# EAGLE board dev_kit_f103 (EAGLE 9.6.2)
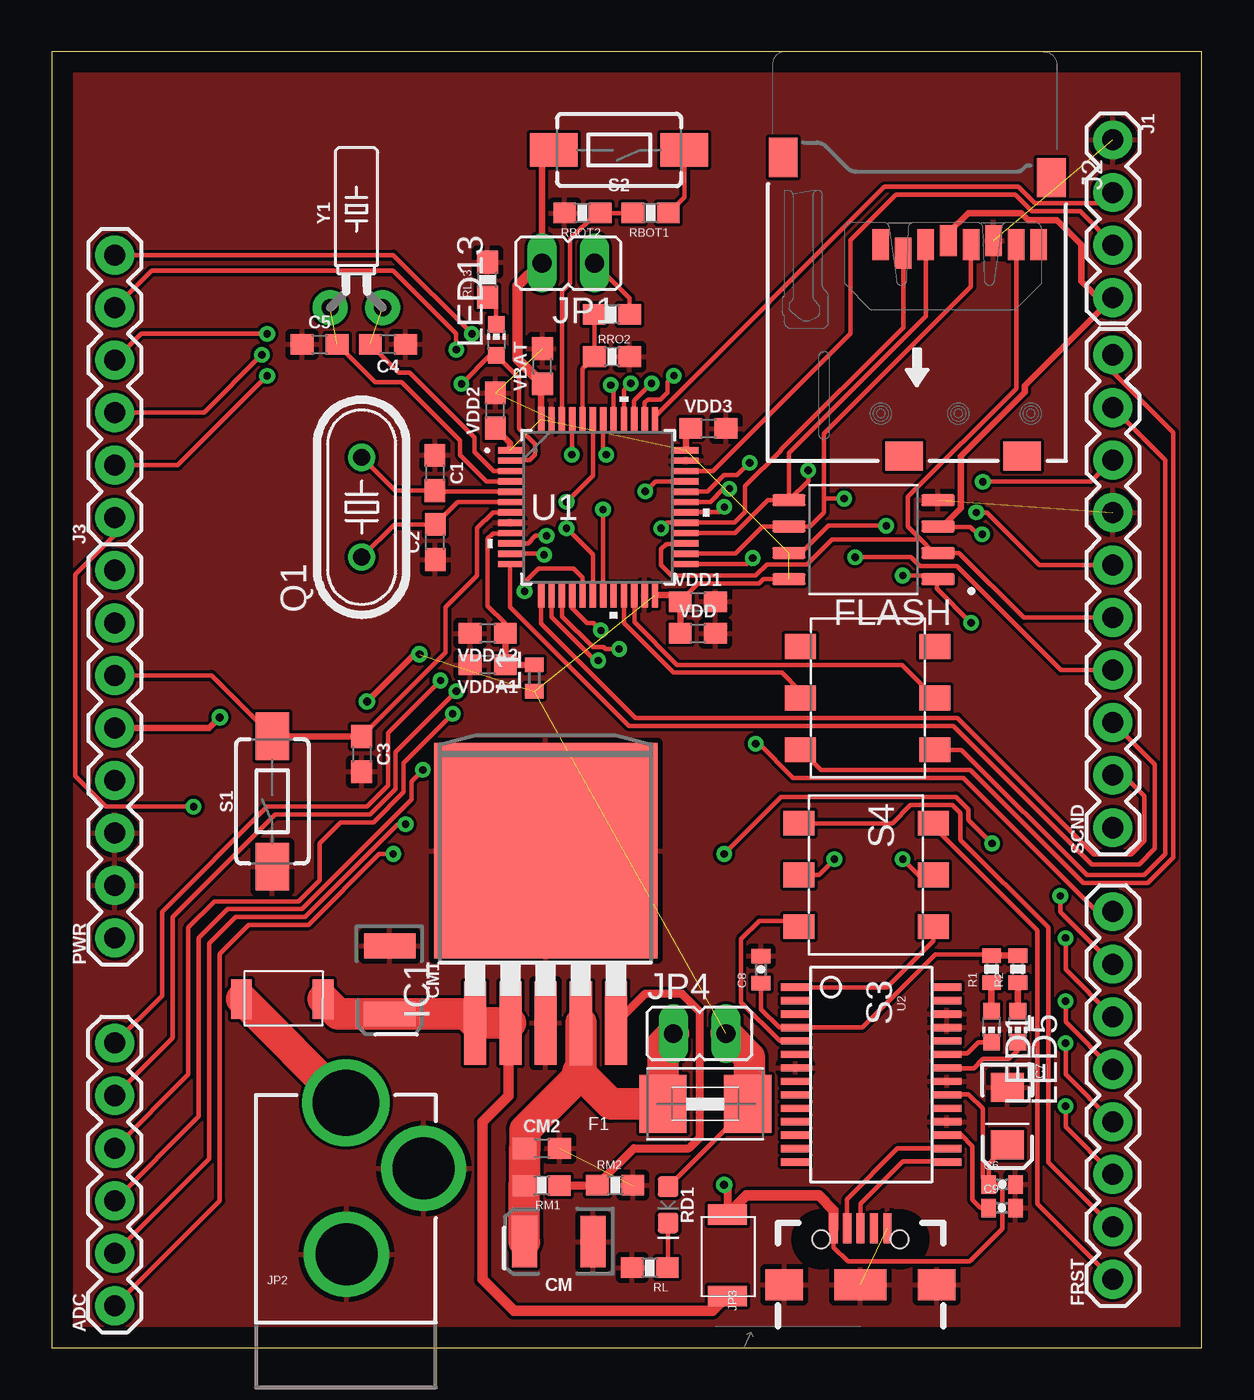
[diagram p0: board, top side]
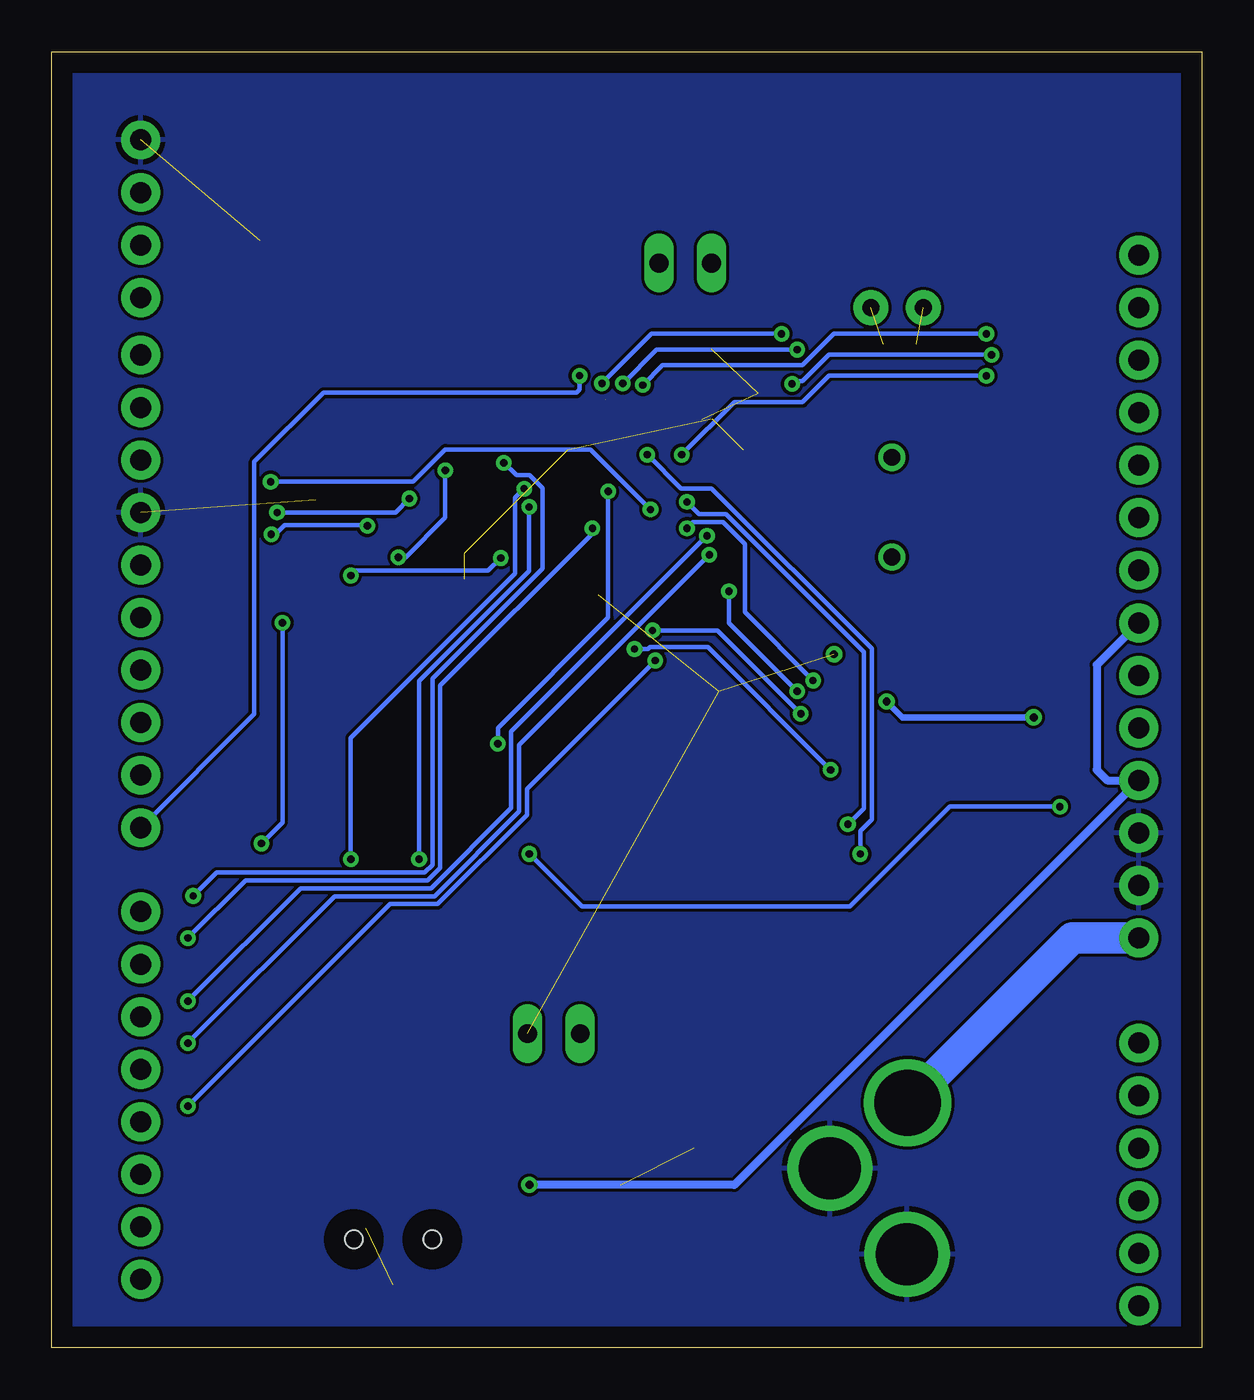
[diagram p1: board, bottom side, seen from below]

Size 55.61 x 62.66 mm. Coordinates in mm from the lower left corner, seen from the top.
Outline: 0,0 55.61,0 55.61,62.66 0,62.66 0,0
Copper layers (1*16): Top 0.035mm / dielectric 1.5mm / Bottom 0.035mm
Design rules "default": minimum track width 6mil, minimum drill 0.35mm, track to track 6mil, track to pad 6mil, pad to pad 6mil, via to via 6mil, smd to smd 6mil, copper to edge 40mil, drill to drill 6mil, minimum pad ring 10mil, minimum via ring 8mil, stop-mask expansion 4mil, vias tented up to drill 0mil, thermal gap 10mil
Net classes: 1 power: width 0.254 mm

## Footprints (pad centres in the part's own frame; a part is rotated, then mirrored left to right if it is on the bottom)
1X06 = drill 1.016 pad 1.88: 1 0,0; 2 2.54,0; 3 5.08,0; 4 7.62,0; 5 10.16,0; 6 12.7,0
0603 = smd 1.1 x 1: 1 -0.85,0; 2 0.85,0
0402-CAP = smd 0.7 x 0.9: 1 -0.65,0; 2 0.65,0
EIA3216 = smd 1.4 x 1.6: A 1.4,0; C -1.4,0
EIA3528 = smd 1.2 x 2.5: A 1.65,0; C -1.65,0
3ASCHOOTKY = smd 1 x 1.9: IN 0.446,-1.325; OUT 4.396,-1.325
1812 = smd 2.286 x 2.794: 1 -2.046,0; 2 2.046,0
W25Q64 = smd 1.61 x 0.58: CLK 3.605,-0.635; CS -3.605,1.905; DI 3.605,-1.905; DO -3.605,0.635; GND -3.605,-1.905; H/R 3.605,0.635; VCC 3.605,1.905; WP -3.605,-0.635
1X08 = drill 1.016 pad 1.88: 1 0,0; 2 2.54,0; 3 5.08,0; 4 7.62,0; 5 10.16,0; 6 12.7,0; 7 15.24,0; 8 17.78,0
TO263-5 = smd 1.067 x 4.039: 1 -3.404,-5.791; 2 -1.702,-5.791; 3 0,-5.791; 4 1.702,-5.791; 5 3.404,-5.791 | smd 10.8 x 10.41: 6 0,2.54
1X04 = drill 1.016 pad 1.88: 1 0,0; 2 2.54,0; 3 5.08,0; 4 7.62,0
CON-SD-CARD_2908-05 = smd 0.8 x 1.5: 1 1.761,3.847; 2 0.669,4.253; 3 -0.423,3.847; 4 -1.515,3.644; 5 -2.607,3.847; 6 -3.7,3.644; 7 -4.792,3.847; 8 -5.884,3.847 | smd 1.397 x 1.905: GND@1 -6.5,0.6; GND@2 6.473,-0.389 | smd 1.803 x 1.397: GND@3 0.631,14.059; GND@4 -5.084,14.059
JP1 = drill 0.914 long: 1 0,-1.27; 2 0,1.27
POWER_JACK_PTH_LOCK = drill 2.997 pad 4.115: GND 0.025,6.557; GNDBREAK 3.762,10.7 | drill 3.2 pad 4.115: PWR 0,13.878
USB-B-MICRO-SMD_V03 = smd 1.45 x 0.4: D+1 2.725,0; D-1 2.725,0.65; GND1 2.725,-1.3; ID1 2.725,-0.65; VBUS1 2.725,1.3 | smd 1.5 x 1.8: SHIELD1 0,3.685; SHIELD2 0,-3.685 | smd 1.5 x 2.5: SHIELD3 0,0 | hole 0.85: 2.2,1.9; 2.2,-1.9
0402 = smd 0.7 x 0.9: 1 -0.65,0; 2 0.65,0
CHIP-LED0603 = smd 0.8 x 0.8: A 0,-0.75; C 0,0.75
HC49/S = drill 0.813: 1 -2.413,0; 2 2.413,0
0402-RES = smd 0.7 x 0.9: 1 -0.65,0; 2 0.65,0
0603-RES = smd 1.1 x 1: 1 -0.85,0; 2 0.85,0
LED-0603 = smd 1 x 1: A -0.877,0; C 0.877,0
TACTILE_SWITCH_SMD_6.0X3.5MM = smd 2.3 x 1.6: 1 -3.15,0; 2 3.15,0
452403012014 = smd 1.2 x 1.5: 1 -2.5,3.25; 2 0,3.25; 3 2.5,3.25; 4 -2.5,-3.25; 5 0,-3.25; 6 2.5,-3.25
1X10 = drill 1.016 pad 1.88: 1 0,0; 2 2.54,0; 3 5.08,0; 4 7.62,0; 5 10.16,0; 6 12.7,0; 7 15.24,0; 8 17.78,0; 9 20.32,0; 10 22.86,0
LQFP48-7X7MM = smd 1.194 x 0.305: 1 -4.25,2.75; 2 -4.25,2.25; 3 -4.25,1.75; 4 -4.25,1.25; 5 -4.25,0.75; 6 -4.25,0.25; 7 -4.25,-0.25; 8 -4.25,-0.75; 9 -4.25,-1.25; 10 -4.25,-1.75; 11 -4.25,-2.25; 12 -4.25,-2.75; 25 4.25,-2.75; 26 4.25,-2.25; 27 4.25,-1.75; 28 4.25,-1.25; 29 4.25,-0.75; 30 4.25,-0.25; 31 4.25,0.25; 32 4.25,0.75; 33 4.25,1.25; 34 4.25,1.75; 35 4.25,2.25; 36 4.25,2.75 | smd 0.305 x 1.194: 13 -2.75,-4.25; 14 -2.25,-4.25; 15 -1.75,-4.25; 16 -1.25,-4.25; 17 -0.75,-4.25; 18 -0.25,-4.25; 19 0.25,-4.25; 20 0.75,-4.25; 21 1.25,-4.25; 22 1.75,-4.25; 23 2.25,-4.25; 24 2.75,-4.25; 37 2.75,4.25; 38 2.25,4.25; 39 1.75,4.25; 40 1.25,4.25; 41 0.75,4.25; 42 0.25,4.25; 43 -0.25,4.25; 44 -0.75,4.25; 45 -1.25,4.25; 46 -1.75,4.25; 47 -2.25,4.25; 48 -2.75,4.25
SSOP28DB = smd 0.348 x 1.397: 1 -4.225,-3.656; 2 -3.575,-3.656; 3 -2.925,-3.656; 4 -2.275,-3.656; 5 -1.625,-3.656; 6 -0.975,-3.656; 7 -0.325,-3.656; 8 0.325,-3.656; 9 0.975,-3.656; 10 1.625,-3.656; 11 2.275,-3.656; 12 2.925,-3.656; 13 3.575,-3.656; 14 4.225,-3.656; 15 4.225,3.656; 16 3.575,3.656; 17 2.925,3.656; 18 2.275,3.656; 19 1.625,3.656; 20 0.975,3.656; 21 0.325,3.656; 22 -0.325,3.656; 23 -0.975,3.656; 24 -1.625,3.656; 25 -2.275,3.656; 26 -2.925,3.656; 27 -3.575,3.656; 28 -4.225,3.656
CRYSTAL-PTH-2X6-CYL-KIT = drill 0.813 pad 1.676: 1 -1.27,0; 2 1.27,0

## Placement (x,y rotation side)
ADC  [1X06]  3.05,2.03 90 top
C1  22pF  [0603]  18.52,42.3 270 top
C2  22pF  [0603]  18.54,38.96 90 top
C3  0.1uF  [0603]  14.99,28.7 270 top
C4  15pF  [0603]  16.26,48.51 180 top
C5  15pF  [0603]  12.95,48.51 0 top
C6  0.1uF  [0402-CAP]  45.95,7.9 0 top
C7  10uF  [EIA3216]  46.21,11.2 270 top
C8  0.1uF  [0402-CAP]  34.29,18.29 90 top
C9  0.1uF  [0402-CAP]  45.95,6.76 0 top
CM  10uF  [EIA3528]  24.52,5.13 180 top
CM1  10uF  [EIA3528]  16.35,17.79 270 top
CM2  100nF  [0603]  23.71,9.65 0 top
D1  [3ASCHOOTKY]  34,6.89 270 top
D2  [3ASCHOOTKY]  8.73,18.18 0 top
F1  [1812]  31.6,11.79 0 top
FLASH  [W25Q64]  39.25,39.07 180 top
FRST  [1X08]  51.31,3.31 90 top
IC1  [TO263-5]  23.88,21.49 0 top
J1  [1X04]  51.31,58.4 270 top
J2  CON-SD-CARD_MICROSD-2908-05  [CON-SD-CARD_2908-05]  41.84,57.17 180 top
J3  [1X06]  3.05,40.13 90 top
JP1  [JP1]  24.97,52.45 90 top
JP2  POWER  [POWER_JACK_PTH_LOCK]  14.22,-2.03 0 top
JP3  USB  [USB-B-MICRO-SMD_V03]  39.1,3.05 90 top
JP4  [JP1]  31.32,15.19 270 top
L1  BLM15HB221SN1  [0402]  23.34,32.38 90 top
LED1  GREEN  [CHIP-LED0603]  45.44,15.52 180 top
LED5  YELLOW  [CHIP-LED0603]  46.71,15.52 180 top
LED13  [CHIP-LED0603]  21.49,48.73 0 top
PWR  [1X08]  3.05,19.81 90 top
Q1  [HC49/S]  14.99,40.64 90 top
R1  470  [0402-RES]  45.44,18.31 90 top
R2  470  [0402-RES]  46.71,18.31 90 top
RBOT1  330  [0603-RES]  28.96,54.86 180 top
RBOT2  10k  [0603-RES]  25.65,54.86 180 top
RD1  Red  [LED-0603]  29.8,6.91 270 top
RL  1.5k  [0603-RES]  28.92,3.87 180 top
RL13  470  [0603-RES]  21.07,51.64 90 top
RM1  316  [0603-RES]  23.7,7.85 180 top
RM2  187  [0603-RES]  27.24,7.87 0 top
RRO1  10k  [0603-RES]  27.09,47.92 0 top
RRO2  330  [0603-RES]  27.09,49.96 180 top
S1  MOMENTARY-SWITCH-SPST-SMD-6.0X3.5MM  [TACTILE_SWITCH_SMD_6.0X3.5MM]  10.67,26.42 90 top
S2  MOMENTARY-SWITCH-SPST-SMD-6.0X3.5MM  [TACTILE_SWITCH_SMD_6.0X3.5MM]  27.43,57.91 180 top
S3  [452403012014]  39.37,22.86 270 top
S4  [452403012014]  39.46,31.41 270 top
SCND  [1X10]  51.31,25.14 90 top
U1  [LQFP48-7X7MM]  26.42,40.64 0 top
U2  FT232RLSSOP  [SSOP28DB]  39.62,13.21 270 top
VBAT  100nF  [0603]  23.73,47.45 90 top
VDD  4.7uF  [0603]  31.24,34.54 0 top
VDD1  100nF  [0603]  31.24,36.07 0 top
VDD2  100nF  [0603]  21.45,45.31 90 top
VDD3  100nF  [0603]  31.75,44.45 0 top
VDDA1  1uF  [0603]  21.08,33.02 180 top
VDDA2  100nF  [0603]  21.08,34.54 180 top
Y1  32.768kHz  [CRYSTAL-PTH-2X6-CYL-KIT]  14.73,50.29 0 top

## Library data of the parts
ADC J3 = SparkFun-Connectors; PROD_ID: CONN-08437
C1-C5 = SparkFun-Capacitors; PROD_ID: CAP-07876
C6-C9 R1 R2 U2 = SparkFun
CM CM1 = SparkFun-Capacitors; PROD_ID: CAP-08063
CM2 VBAT VDD VDD1-VDD3 VDDA1 VDDA2 = SparkFun-Capacitors; PROD_ID: CAP-00810
D1 D2 = 1N4007
F1 LED1 LED5 LED13 = adafruit
FLASH = W25Q64
FRST PWR = SparkFun-Connectors; PROD_ID: CONN-08438
IC1 = MIC29302WU; AVAILABILITY: Good; DESCRIPTION: Linear Voltage Regulator IC Positive Adjustable 1 Output 3A TO-263-5; MF: Microchip Technology; MP: MIC29302WU; PACKAGE: TO-263-6 Microchip Technology; PRICE: None; PURCHASE-URL: https://pricing.snapeda.com/search/part/MIC29302WU/?ref=eda
J1 = SparkFun-Connectors; PROD_ID: CONN-09696
J2 = 52101-101-REV-A_v16
JP1 JP4 = jumper
JP2 = SparkFun-Connectors; PROD_ID: CONN-08197; SF_ID: PRT-00119
JP3 = SparkFun-Connectors; PROD_ID: CONN-11752
L1 = inductors
Q1 = crystal; OC_FARNELL: 1667008; OC_NEWARK: unknown
RBOT1 RBOT2 RL RL13 RM1 RM2 RRO1 RRO2 = SparkFun-Resistors; PROD_ID: RES-08296
RD1 = SparkFun-LED; PROD_ID: DIO-11154
S1 S2 = SparkFun-Switches; PROD_ID: SWCH-00815; SF_SKU: COM-08229
S3 S4 = step_switch
SCND = SparkFun-Connectors; PROD_ID: CONN-11563
U1 = STM32F103C8T6; BUILT_BY: EMA_UL_Team; COPYRIGHT: Copyright (C) 2018 Accelerated Designs. All rights reserved; MANUFACTURER_PART_NUMBER: STM32F103C8T6; SOURCELIBRARY: Updates_to_database_2020-10-19; VENDOR: STMicroelectronics
Y1 = SparkFun-Clocks; PROD_ID: XTAL-10112

## Nets
3.3V: F1.2 FLASH.H/R FLASH.VCC FLASH.WP J1.4 J2.4 JP1.2 JP4.2 L1.1 PWR.5 RD1.A S2.2 U1.1 U1.24 U1.36 U1.48 VBAT.1 VDD1.1 VDD2.1 VDD3.1 VDD.1
BOOT0: RRO1.1 RRO2.2 U1.44
BUTTON: RBOT1.2 RBOT2.1 U1.46
CRX1: FRST.1 S3.1
CRX3: S4.1
CS2: FLASH.CS J3.1 U1.25
CSCL: S4.6 SCND.10
CSDA: S4.3 SCND.9
CTX1: FRST.2 S3.4
CTX3: S4.4
GND: C1.1 C2.1 C3.2 C4.1 C5.1 C6.2 C7.C C8.2 C9.2 CM1.C CM2.2 CM.C FLASH.GND IC1.3 IC1.6 J1.1 J2.6 JP2.GND JP2.GNDBREAK JP3.GND1 JP3.SHIELD1 JP3.SHIELD2 JP3.SHIELD3 PWR.2 PWR.3 RBOT2.2 RL13.2 RL.2 RM2.2 RRO1.2 S1.1 SCND.7 U1.8 U1.23 U1.35 U1.47 U2.7 U2.18 U2.21 U2.25 U2.26 VBAT.2 VDD1.2 VDD2.2 VDD3.2 VDD.2 VDDA1.2 VDDA2.2
LED: J3.3 LED13.A U1.2
MISO2: FLASH.DO J2.7 SCND.5 U1.27
MOSI2: FLASH.DI J2.3 SCND.4 U1.28
N$1: CM1.A D1.OUT D2.OUT IC1.1 IC1.2
N$2: CM2.1 CM.A F1.1 IC1.4 JP4.1 RM1.2
N$3: JP1.1 RRO2.1
N$4: LED13.C RL13.1
N$5: RBOT1.1 S2.1
N$6: LED1.A R1.1
N$7: LED5.A R2.1
N$8: C9.1 U2.17
N$20: IC1.5 RM1.1 RM2.1
N$35: RD1.C RL.1
NRST: C3.1 PWR.6 S1.2 U1.7
OSC32_IN: C4.2 U1.3 Y1.2
OSC32_OUT: C5.2 U1.4 Y1.1
OSC_IN: C1.2 Q1.2 U1.5
OSC_OUT: C2.2 Q1.1 U1.6
PA0: FRST.5 U1.10
PA1: FRST.4 U1.11
PA4: FRST.3 U1.14
PA5: ADC.3 U1.15
PA6: ADC.4 U1.16
PA7: ADC.5 U1.17
PA8: FRST.6 J2.2 U1.29
PA11: FRST.7 U1.32
PA12: FRST.8 U1.33
PA15: SCND.1 U1.38
PB0: ADC.6 U1.18
PB1: SCND.8 U1.19
PB3: J3.6 U1.39
PB4: J3.5 U1.40
PB5: J3.4 U1.41
PB8: J3.2 U1.45
RX1: S3.2 U1.31
RX2: SCND.2 U1.13
RX3/SDA2: S4.2 U1.22
RXLED: LED5.C U2.22
SCK2: FLASH.CLK J2.5 SCND.6 U1.26
SCL1: ADC.1 U1.42
SDA1: ADC.2 U1.43
SWCLK: J1.2 U1.37
SWDIO: J1.3 U1.34
TX1: S3.5 U1.30
TX2: SCND.3 U1.12
TX3/SCL2: S4.5 U1.21
TXLED: LED1.C U2.23
URX1: S3.3 U2.1
USB_D+: JP3.D+1 U2.15
USB_D-: JP3.D-1 U2.16
UTX1: S3.6 U2.5
V_USB: C6.1 C7.A D1.IN JP3.VBUS1 PWR.4 PWR.7 U2.20
VCC: C8.1 R1.2 R2.2 U2.4
VDDA: L1.2 U1.9 VDDA1.1 VDDA2.1
VIN: D2.IN JP2.PWR PWR.1

## Tracks (layer width: path | path; a pad name or v marks a point on that pad's centre or on a via)
3.3V  (via drill 0.35, 0.38)  (7 unrouted)
  Top 0.229: F1.2 33.81,11.79 33.74,11.73 RD1.A | VDD1.1 30.39,36.11 31.24,36.96 34.19,36.96 34.4,37.16 FLASH.VCC | FLASH.H/R 36.23,38.44 37.55,39.76 40.33,39.76 v40.35,39.74 | v44.99,39.33 44.78,39.33 44.42,39.69 43.18,39.69 42.87,39.69 FLASH.WP
  Top 0.305: F1.2 33.55,11.69 | VDD2.1 22.17,43.75 U1.1 | U1.48 23.67,46.54 VBAT.1 | U1.36 30.67,44.22 VDD3.1 | U1.24 30.07,36.39 VDD1.1 VDD.1 | J2.4 43.35,53.91 44.31,54.86 46.89,54.86 47.22,54.53 48.59,54.53 49.78,53.34 49.78,51.56 50.57,50.78 J1.4 47.05,46.52 47.05,46.2 43.96,43.11 43.96,40.6 43.18,39.82 43.18,39.69 | JP1.2 23.7,57.33 S2.2 | PWR.5 7.62,29.97 v8.13,30.48 | v15.24,31.24 17.53,33.53 v17.78,33.53
  Top 0.508: VBAT.1 22.53,47.81 22.53,51.34 23.63,52.45 JP1.2
  Top 1.524: JP4.2 33.74,14.04 33.74,11.73
  Bottom 0.229: v40.35,39.74 40.4,39.79 44.33,39.79 44.79,39.33 v44.99,39.33
  Bottom 0.305: v8.13,30.48 14.48,30.48 v15.24,31.24
BOOT0
  Top 0.229: RRO2.2 RRO1.1 25.67,47.35 U1.44
BUTTON
  Top 0.229: RBOT1.2 RBOT2.1 26.33,54.86 25.06,53.59 25.06,51.47 24.67,51.07 U1.46
CRX1
  Top 0.229: FRST.1 47.65,6.96 47.65,20.18 42.62,25.21 S3.1
CS2  (via drill 0.35)
  Top 0.229: U1.25 33.6,37.89 v33.89,38.18 | v41.15,37.34 42.68,37.34 42.8,37.21 | 42.8,37.21 FLASH.CS | J3.1 3.05,39.29 1.13,37.38 1.13,27.64 2.61,26.16 v6.86,26.16 | v45.47,24.38 44.32,25.53 44.32,26.02 43.71,26.63 35.27,26.63 v32.51,23.88 | v44.45,35.05 42.8,36.7 42.8,37.21
  Bottom 0.229: v33.89,38.18 34.5,37.57 40.92,37.57 v41.15,37.34 | v6.86,26.16 12.19,26.16 17.02,21.34 29.97,21.34 v32.51,23.88 | v45.47,24.38 44.45,25.4 v44.45,35.05
CSCL
  Top 0.229: SCND.10 51.3,47.17 54.23,44.25 54.23,23.72 52.99,22.48 49.88,22.48 44.42,27.94 37.18,27.94 S4.6
CSDA
  Top 0.229: SCND.9 53.85,42.92 53.85,23.88 52.83,22.86 50.04,22.86 43.99,28.91 S4.3
CTX1
  Top 0.229: FRST.2 48.18,8.97 48.18,20.32 43.94,24.56 43.94,25.86 43.55,26.25 41.53,26.25 40.64,25.36 S3.4
GND  (6 unrouted)
  pour Top: -5.59,65.02 -5.59,-3.81 59.18,-3.81 59.18,65.02
  pour Bottom: -7.87,67.06 -7.87,-6.1 62.23,-6.1 62.23,67.06
LED  (via drill 0.35)
  Top 0.229: U1.2 22.2,42.93 23.11,42.93 23.37,43.18 23.37,43.69 22.61,44.45 22.61,46.87 LED13.A 21.2,47.98 v19.81,46.6 | J3.3 7.37,45.22 v10.16,48.01
  Bottom 0.229: v10.16,48.01 18.03,48.01 19.3,46.74 19.68,46.74 v19.81,46.6
MISO2
  Top 0.229: J2.7 46.63,46.38 41.4,41.15 41.4,39.69 41.94,39.15 | FLASH.DO 42.66,38.44 41.94,39.15 | U1.27 30.64,38.86 29.72,38.86 29.46,38.61 29.46,37.85 29.97,37.34 34.04,37.34 34.58,37.88 36.51,37.88 37.72,39.09 41.88,39.09 41.94,39.15 | 42.19,38.44 FLASH.DO | SCND.5 46.99,35.3 43.86,38.44 FLASH.DO
MOSI2  (via drill 0.35)
  Top 0.229: J2.3 42.26,49.88 35.64,43.26 FLASH.DI | U1.28 33.04,39.39 34.62,40.98 FLASH.DI | SCND.4 48.78,32.77 43.76,37.79 41.97,37.79 41.54,38.22 v38.84,38.22 | v36.58,42.42 36.58,41.91 FLASH.DI
  Bottom 0.229: v38.84,38.22 38.83,38.21 38.5,38.21 36.58,40.13 v36.58,42.42
N$1
  Top 0.508: D1.OUT 31.96,1.78 22.35,1.78 20.83,3.3 20.83,10.92 22.1,12.19 22.1,15.62 IC1.2
  Top 1.524: D2.OUT 13.85,16.13 CM1.A 20.04,16.13 IC1.1 IC1.2
N$2
  Top 1.524: CM.A 22.85,5.15 RM1.2 CM2.1 22.88,9.67 22.88,10.54 24.07,11.73 | JP4.1 29.55,14.69 F1.1 27.03,11.79 25.58,13.24 | 24.07,11.73 | IC1.4 25.58,13.5 25.45,13.37 25.58,13.24 | 24.07,11.73 25.58,13.24
N$3
  Top 0.229: JP1.1 27.94,50.75 RRO2.1
N$4
  Top 0.229: RL13.1 21.49,50.37 LED13.C
N$5
  Top 0.229: 30.31,58.18 S2.1 30.58,55.64 RBOT1.1
N$6
  Top 0.305: R1.1 LED1.A
N$7
  Top 0.305: R2.1 LED5.A
N$8
  Top 0.229: U2.17 43.29,10.3 43.97,10.3 44.52,9.75 44.52,7.15 44.9,6.76 C9.1
N$20
  Top 0.381: RM1.1 24.56,7.87 RM2.1 26.63,8.1 26.63,8.14 28.14,9.65 30.82,9.65 31.33,10.16 31.33,16.27 30.48,17.12 28.7,17.12 IC1.5
N$35
  Top 0.229: RD1.C 29.8,3.91 RL.1
NRST
  Top 0.229: U1.7 21.34,40.39 20.57,39.62 20.57,37.34 19.05,35.81 19.05,33.62 C3.1 | PWR.6 7.73,32.51 10.68,29.55
  Top 0.305: C3.1 10.68,29.55 S1.2
OSC32_IN  (1 unrouted)
  Top 0.229: U1.3 21.36,42.39 20.45,43.31 20.45,44.01 17.31,47.15 16.77,47.15 C4.2
OSC32_OUT  (1 unrouted)
  Top 0.229: C5.2 15.63,46.69 16.93,46.69 19.75,43.86 19.75,43.17 21.03,41.89 U1.4
OSC_IN
  Top 0.229: Q1.2 16.59,41.45 C1.2 18.58,41.39 U1.5
OSC_OUT
  Top 0.229: Q1.1 16.57,39.81 C2.2 19.62,40.89 U1.6
PA0  (via drill 0.35)
  Top 0.229: FRST.5 49.02,15.75 v49.02,16.76 | U1.10 23.03,38.89 23.4,39.26 v23.92,39.26
  Bottom 0.229: v49.02,16.76 43.57,22.21 37.26,22.21 33.39,26.09 33.39,29.79 v23.92,39.26
PA1  (via drill 0.35)
  Top 0.229: FRST.4 49.02,13.21 v49.02,14.73 | v23.81,38.34 23.76,38.39 U1.11
  Bottom 0.229: v49.02,14.73 41.92,21.83 37.11,21.83 33.01,25.93 33.01,29.14 v23.81,38.34
PA4  (via drill 0.35)
  Top 0.229: FRST.3 49.02,10.67 v49.02,11.68 | v26.42,33.23 26.27,33.23 24.17,35.33 U1.14
  Bottom 0.229: v49.02,11.68 39.25,21.45 36.95,21.45 32.63,25.77 32.63,27.02 v26.42,33.23
PA5  (via drill 0.35)
  Top 0.229: ADC.3 7.11,11.18 7.11,19.81 8.51,21.21 12.1,21.21 17.4,26.51 17.4,27.39 v17.95,27.94 | v27.43,33.78 26.78,33.78 26.69,33.87 26.16,33.87 24.67,35.37 U1.15
  Bottom 0.229: v27.43,33.78 26.78,33.78 26.69,33.87 23.88,33.87 v17.95,27.94
PA6  (via drill 0.35)
  Top 0.229: ADC.4 6.6,13.21 6.6,20.32 7.87,21.59 11.94,21.59 12.95,22.61 12.95,24.38 13.97,25.4 15.56,25.4 17.02,26.86 17.02,28.28 v19.39,30.65 | v26.55,34.68 26.18,35.05 25.88,35.05 25.17,35.76 U1.16
  Bottom 0.229: v19.39,30.65 23.42,34.68 v26.55,34.68
PA7  (via drill 0.35)
  Top 0.229: ADC.5 5.84,14.99 5.84,20.83 10.8,25.78 15.4,25.78 16.64,27.02 16.64,28.81 v19.57,31.74 | v22.86,36.58 22.83,36.6 22.83,36.96 23.55,37.68 25.24,37.68 25.67,37.25 U1.17
  Bottom 0.229: v19.57,31.74 22.86,35.04 v22.86,36.58
PA8  (via drill 0.35)
  Top 0.229: J2.2 41.17,49.33 35.26,43.42 35.26,43.39 33.53,41.66 33.53,40.42 33,39.89 U1.29 29.73,39.89 v29.46,39.62 | FRST.6 49.02,18.29 v49.02,19.81
  Bottom 0.229: v29.46,39.62 29.46,39.37 36.82,32.01 36.82,23.2 37.42,22.6 46.24,22.6 v49.02,19.81
PA11  (via drill 0.35)
  Top 0.229: FRST.7 48.77,21.09 v48.77,21.84 | v33.75,42.79 33.14,42.18 32.5,42.18 31.71,41.39 U1.32
  Bottom 0.229: v48.77,21.84 47.64,22.98 37.58,22.98 37.2,23.35 37.2,32.35 31.88,37.68 31.88,41.56 32.5,42.18 33.14,42.18 v33.75,42.79
PA12  (via drill 0.35)
  Top 0.229: FRST.8 50.54,21.09 44.07,27.56 35.84,27.56 34.19,29.21 v34.04,29.21 | v28.7,41.4 29.19,41.89 U1.33
  Bottom 0.229: v34.04,29.21 34.04,29.97 28.7,35.31 v28.7,41.4
PA15  (via drill 0.35)  (1 unrouted)
  Top 0.229: U1.38 28.67,45.69 28.82,45.85 | v30.08,47 29.77,46.69 29.77,46.17 29.43,45.84 28.82,45.84
  Bottom 0.229: SCND.1 45.81,30.64 45.81,42.84 42.47,46.18 30.23,46.18 30.08,46.32 v30.08,47
PB0  (via drill 0.35)
  Top 0.229: ADC.6 5.33,17.02 5.33,21.08 10.41,26.16 15.24,26.16 16.26,27.18 16.26,29.72 v18.8,32.26 | v24.89,39.62 26.17,38.35 U1.18
  Bottom 0.229: v18.8,32.26 22.1,35.56 22.1,38.86 23.16,39.92 24.59,39.92 v24.89,39.62
PB1  (via drill 0.35)
  Top 0.229: SCND.8 50.25,41.87 v45.02,41.87 | v26.65,40.53 26.65,36.4 U1.19
  Bottom 0.229: v45.02,41.87 38.14,41.87 36.58,43.43 29.56,43.43 v26.65,40.53
PB3  (via drill 0.35)
  Top 0.229: J3.6 16.51,52.84 v20.32,49.02 | U1.39 28.16,45.79 v29,46.63
  Bottom 0.229: v20.32,49.02 26.61,49.02 v29,46.63
PB4  (via drill 0.35)
  Top 0.229: J3.5 4.82,52.07 16.51,52.07 19.56,49.02 v19.56,48.26 | v28,46.62 27.67,46.29 U1.40
  Bottom 0.229: v28,46.62 26.36,48.26 v19.56,48.26
PB5  (via drill 0.35)
  Top 0.229: J3.4 4.32,49.02 v10.41,49.02 | U1.41 27.17,46.41 v27.03,46.55
  Bottom 0.229: v27.03,46.55 26.07,47.5 19.3,47.5 17.78,49.02 v10.41,49.02
PB8  (via drill 0.35)
  Top 0.229: J3.2 6.1,42.68 6.1,42.67 v10.41,46.99 | v25.15,43.18 25.15,44.87 U1.45
  Bottom 0.229: v10.41,46.99 18.03,46.99 19.3,45.72 22.61,45.72 v25.15,43.18
RX1  (via drill 0.35)
  Top 0.229: U1.31 31.84,40.9 32.48,41.54 v32.76,41.54 | v41.15,23.62 41.91,22.86 S3.2
  Bottom 0.229: v32.76,41.54 v32.76,41.53 33.2,41.1 33.2,37.43 41.15,29.48 v41.15,23.62
RX2
  Top 0.229: U1.13 23.67,35.01 28.22,30.45 43.8,30.45 50.39,23.86 52.19,23.86 52.83,24.5 52.83,26.67 51.82,27.69 SCND.2
RX3/SDA2
  Top 0.229: S4.2 41.1,33.02 30.23,33.02 28.17,35.08 U1.22
RXLED
  Top 0.229: U2.22 43.29,13.52 44.58,13.52 45.02,13.96 46.29,13.96 46.71,14.38 LED5.C
SCK2  (via drill 0.35)
  Top 0.229: J2.5 44.45,51.3 37.34,44.2 37.34,41.08 | 37.34,41.08 37.34,40.39 36.66,39.71 FLASH.CLK 34.37,39.71 33.06,38.39 U1.26 | SCND.6 47.75,37.84 45.21,40.39 v44.7,40.39 | v38.32,41.06 37.36,41.06 37.34,41.08
  Bottom 0.229: v44.7,40.39 38.99,40.39 v38.32,41.06
SCL1  (via drill 0.35)
  Top 0.229: ADC.1 8.13,7.12 8.13,19.05 9.52,20.45 12.41,20.45 15.84,23.88 v16.51,23.88 | v26.81,43.18 26.67,43.33 U1.42
  Bottom 0.229: v16.51,23.88 16.51,25 15.96,25.55 15.96,33.8 23.7,41.54 25.17,41.54 v26.81,43.18
SDA1  (via drill 0.35)
  Top 0.229: ADC.2 7.62,9.15 7.62,19.56 8.89,20.83 12.25,20.83 16.73,25.31 v17.11,25.31 | v24.89,40.89 26.17,42.17 U1.43
  Bottom 0.229: v24.89,40.89 24.3,40.3 23,40.3 16.35,33.65 16.35,26.07 v17.11,25.31
SWCLK
  Top 0.229: U1.37 29.17,45.03 40.27,56.13 46.75,56.13 47.54,55.34 51.03,55.34 51.31,55.62 J1.2
SWDIO
  Top 0.229: U1.34 31.96,42.39 38.61,49.03 38.61,53.54 40.82,55.75 46.59,55.75 47.39,54.95 49.73,54.95 51.31,53.37 J1.3
TX1  (via drill 0.35)
  Top 0.229: U1.30 32.27,40.4 v32.52,40.65 | v37.85,23.62 37.08,22.86 S3.5
  Bottom 0.229: v32.52,40.65 32.53,40.64 32.53,37.56 37.85,32.25 v37.85,23.62
TX2
  Top 0.229: SCND.3 53.34,28.19 53.34,24.13 52.58,23.37 50.29,23.37 43.59,30.07 27.9,30.07 22.17,35.81 U1.12
TX3/SCL2
  Top 0.229: U1.21 27.67,35.04 30.07,32.64 35.31,32.64 36.21,31.73 S4.5
TXLED
  Top 0.229: U2.23 43.33,14.24 44.28,14.24 44.81,14.77 LED1.C
URX1
  Top 0.229: 42.58,20.32 S3.3 42.62,19.66 40.39,17.43 U2.1
  Top 0.305: 42.33,20.07 S3.3
USB_D+
  Top 0.229: JP3.D+1 39.1,6.96 41.14,9 43.26,9 U2.15
USB_D-
  Top 0.229: JP3.D-1 38.45,7.19 40.9,9.63 U2.16
UTX1
  Top 0.229: S3.6 35.83,20.64 34.21,20.64 33.33,19.77 33.33,16.71 35.2,14.83 U2.5
V_USB  (via drill 0.38)
  Top 0.229: C6.1 45.01,8.19 45.01,11.57 44.33,12.25 43.29,12.25 U2.20 | C6.1 45.79,7.9 45.96,7.73 45.96,5.75 44.39,4.18 38.49,4.18 37.8,4.87 JP3.VBUS1 | C6.1 45.3,8.9 C7.A
  Top 0.381: v32.51,7.87 32.67,7.71 D1.IN
  Top 0.508: JP3.VBUS1 37.8,6.65 37.08,7.37 33.59,7.37 D1.IN
  Bottom 0.381: PWR.7 5.08,33.02 5.08,27.94 4.57,27.43 PWR.4 22.61,7.87 v32.51,7.87
VCC
  Top 0.229: C8.1 34.29,16.37 35.17,15.48 U2.4 39.19,15.48 42.73,19.02 45.39,19.02 R1.2
  Top 0.305: R1.2 R2.2
VDDA
  Top 0.229: U1.9 22.15,39.37 21.34,39.37 21.08,39.12 21.08,35.87 21.93,35.02 21.93,34.29
  Top 0.305: L1.2 23.32,33.02 VDDA1.1 21.93,34.29 VDDA2.1
VIN
  Top 1.524: D2.IN 14.19,11.85 JP2.PWR
  Bottom 1.524: PWR.1 6.26,19.81 JP2.PWR